# Altium PCB touchid-v4-kicad9format.PcbDoc
Units mm, origin at the board's own origin, x right, y up, seen from the top; angles counter-clockwise.
Board outline 19.3 x 19.3 mm, 4 copper layers (F.Cu, In1.Cu, In2.Cu, B.Cu); 46 components, 27 nets, 134 pads, 65 vias.
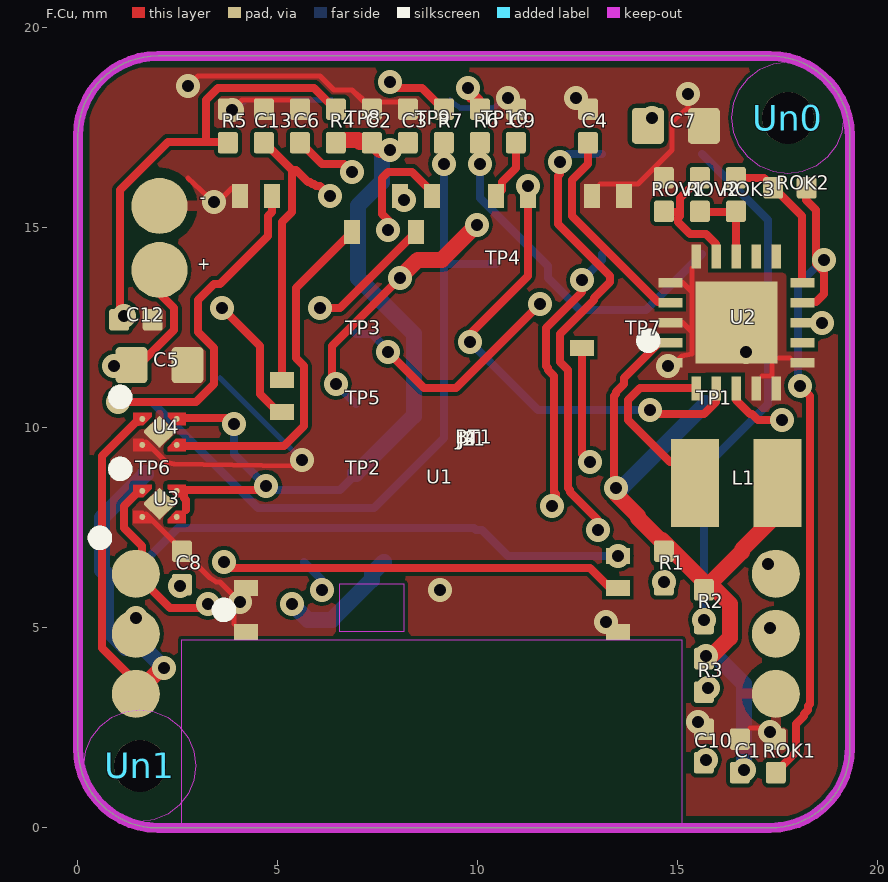
[diagram p0: F.Cu view]
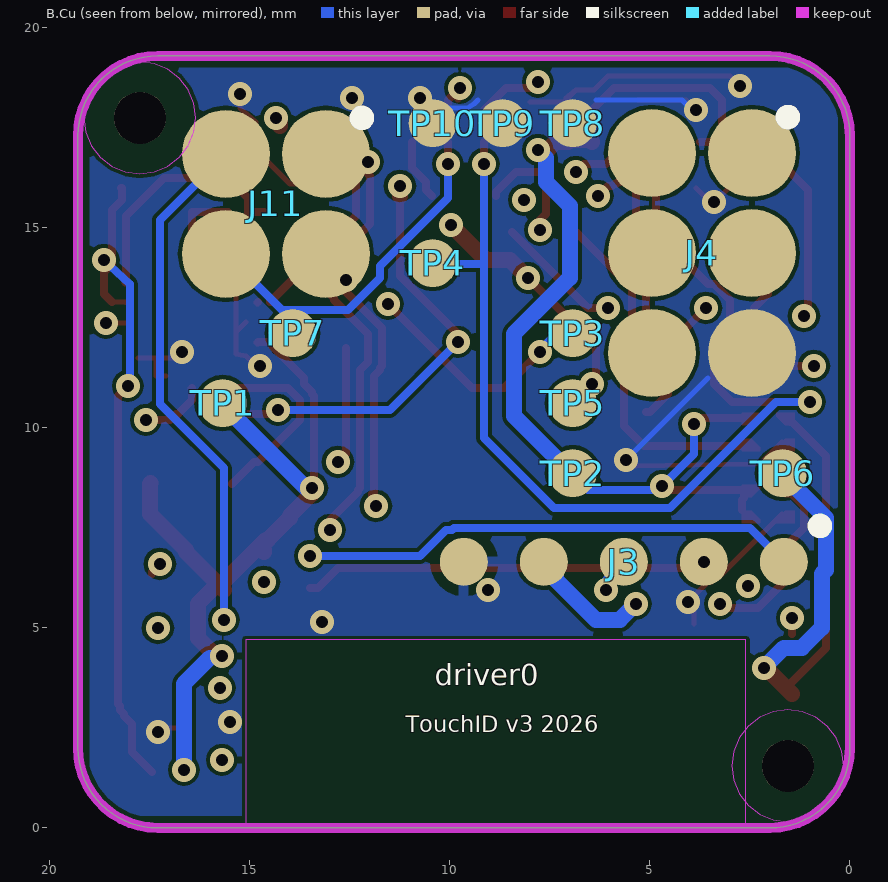
[diagram p1: B.Cu view, seen from below]
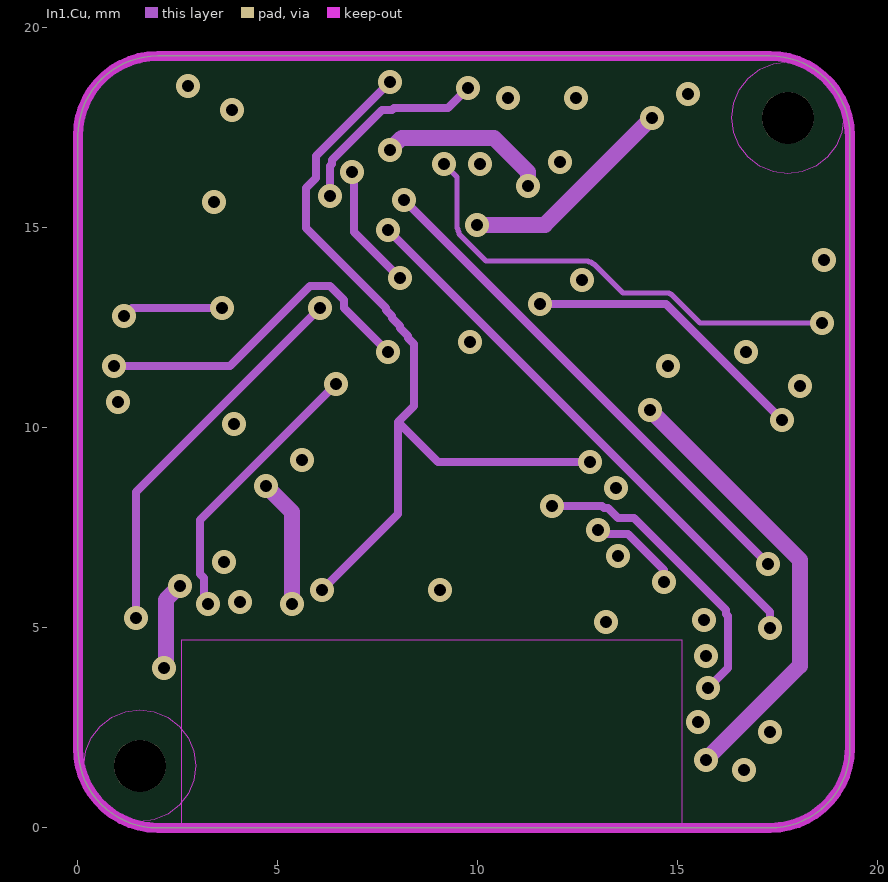
[diagram p2: In1.Cu]
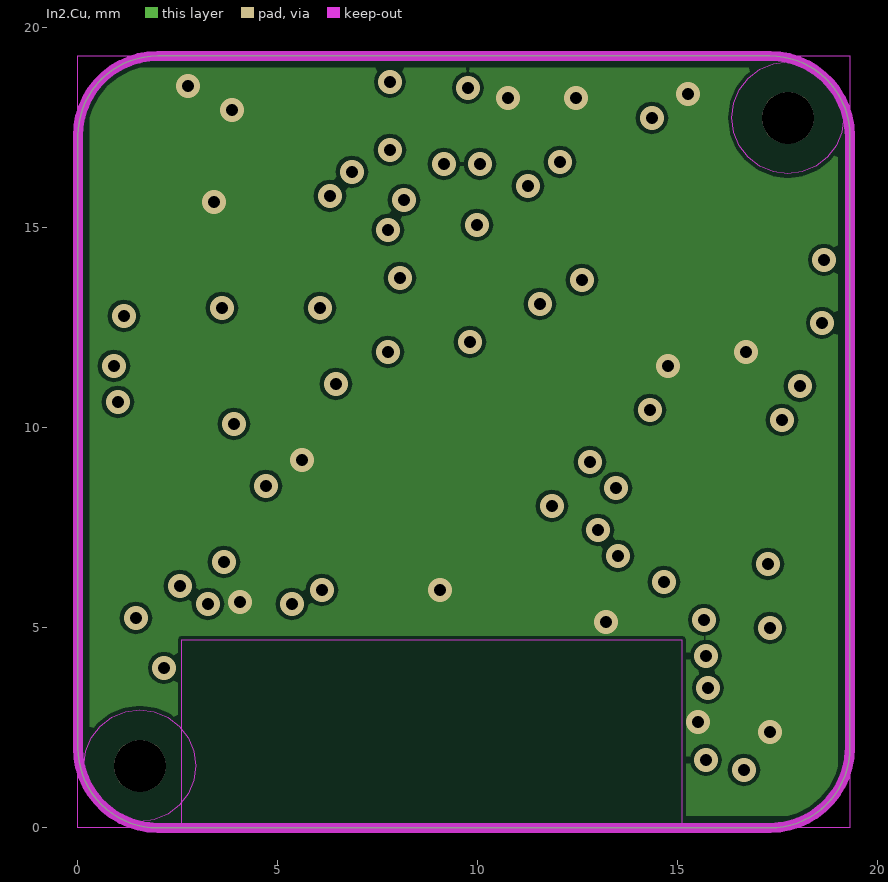
[diagram p3: In2.Cu]

## Layer stack, top to bottom
F.Mask: solder mask 0.0102, Solder Resist, Dk 3.5
F.Cu: signal copper 0.0356
Dielectric 1: dielectric 0.32, FR-4, Dk 4.8
In1.Cu: signal copper 0.0356
Dielectric2: dielectric 0.32, FR-4, Dk 4.8
In2.Cu: signal copper 0.0356
Dielectric3: dielectric 0.32, FR-4, Dk 4.8
B.Cu: signal copper 0.0356
B.Mask: solder mask 0.0102, Solder Resist, Dk 3.5

## Board outline
17.3,19.3 cw(c17.3,17.3) 19.3,17.3 19.3,2 cw(c17.3,2) 17.3,0 2,0 cw(c2,2) 0,2 0,17.3 cw(c2,17.3) 2,19.3 17.3,19.3

## Design rules (kind name [scope] priority, off if disabled: settings)
Clearance "Clearence 0.1_Polygon" [InNamedPolygon('F.Cu-GND') OR InNamedPolygon('In2.Cu-GND') OR InNamedPolygon('B.Cu-GND')] p1: gap=0.1 ignorepadtopadclearanceinfootprint=FALSE
Clearance "Clearence 0.1_NetClass" [InNetClass('Default') OR InNetClass('Power')] p2: gap=0.1 ignorepadtopadclearanceinfootprint=FALSE
MinimumSolderMaskSliver [All] p1: minsoldermaskwidth=0
PolygonConnect Polygon_B.Cu-GND_ConnectDirect [IsNamedPolygon('B.Cu-GND')] p1: connectstyle=Direct reliefconductorwidth=0.254 reliefentries=4 polygonreliefangle="90 Angle" airgapwidth=0.254
PolygonConnect Polygon_In2.Cu-GND_ConnectDirect [IsNamedPolygon('In2.Cu-GND')] p2: connectstyle=Direct reliefconductorwidth=0.254 reliefentries=4 polygonreliefangle="90 Angle" airgapwidth=0.254
PolygonConnect Polygon_F.Cu-GND_ConnectDirect [IsNamedPolygon('F.Cu-GND')] p3: connectstyle=Direct reliefconductorwidth=0.254 reliefentries=4 polygonreliefangle="90 Angle" airgapwidth=0.254
RoutingVias [All] p1: holewidth=0.711 width=1.27 viastyle="Through Hole" minholewidth=0.711 minwidth=1.27 maxholewidth=0.711 maxwidth=1.27
SilkToSilkClearance [All] p1: silktosilkclearance=0
SilkToSolderMaskClearance [IsPad] p1: minsilkscreentomaskgap=0 clearancetoexposedcopper=TRUE
SolderMaskExpansion [All] p1: expansion=0 istentingtop=FALSE
Width [All] p1: maxlimit=10 minlimit=0.127 preferedwidth=0.2 minimp=50.000000 maximp=50.000000 favimp=50.000000
27 further rules are at their usual default settings.

## Classes and differential pairs
net class Power: GND LX SENSOR_3V3 SENSOR_MCU_3V3 VBAT VIN_DC VSTOR
net class Default: BL_FLAG BL_RETURN HARV_1 HARV_2 HARV_3 NRF_VDD OK_HYST OK_PROG RESET SENSOR_RX SENSOR_SW_EN SENSOR_TX SENSOR_WAKEUP SWCLK SWDIO VBAT_OK VBAT_OV_SET VBAT_SENSE VRDIV VREF_SAMP

## Components (designator, comment, footprint, x,y, rotation, side; value= is the part's Value field where it differs from the comment)
BT1 "Comment" BT1 9.65,9.65 r0 top
C1 "Comment" C1 16.55,1.8 r90 top
C2 "Comment" C2 7.35,17.55 r90 top
C3 "Comment" C3 8.25,17.55 r90 top
C4 "Comment" C4 12.75,17.55 r90 top
C5 "Comment" C5 2.04,11.57 r0 top
C6 "Comment" C6 5.55,17.55 r90 top
C7 "Comment" C7 14.95,17.55 r0 top
C8 "Comment" C8 2.6,6.5 r90 top
C9 "Comment" C9 10.95,17.55 r90 top
C10 "Comment" C10 15.65,2.05 r90 top
C12 "Comment" C12 1.45,12.7 r0 top
C13 "Comment" C13 4.65,17.55 r90 top
J2 "Comment" J2 9.65,9.65 r0 top
J3 "Comment" J3 9.65,9.65 r0 top
J4 "Comment" J4 9.65,9.65 r0 top
J11 "Comment" J11 9.65,9.65 r0 top
L1 "Comment" L1 16.46,8.62 r180 top
R1 "Comment" R1 14.65,6.5 r90 top
R2 "Comment" R2 15.65,5.531 r90 top
R3 "Comment" R3 15.65,3.814 r90 top
R4 "Comment" R4 6.45,17.55 r90 top
R5 "Comment" R5 3.75,17.55 r90 top
R6 "Comment" R6 10.05,17.55 r90 top
R7 "Comment" R7 9.15,17.55 r90 top
ROK1 "Comment" ROK1 17.45,1.8 r90 top
ROK2 "Comment" ROK2 17.8,16 r0 top
ROK3 "Comment" ROK3 16.45,15.833 r90 top
ROV1 "Comment" ROV1 14.65,15.833 r90 top
ROV2 "Comment" ROV2 15.55,15.833 r90 top
TP1 "Comment" TP1 15.68,10.62 r0 top
TP2 "Comment" TP2 6.93,8.87 r0 top
TP3 "Comment" TP3 6.93,12.37 r0 top
TP4 "Comment" TP4 10.43,14.12 r0 top
TP5 "Comment" TP5 6.93,10.62 r0 top
TP6 "Comment" TP6 1.68,8.87 r0 top
TP7 "Comment" TP7 13.93,12.37 r0 top
TP8 "Comment" TP8 6.93,17.62 r0 top
TP9 "Comment" TP9 8.68,17.62 r0 top
TP10 "Comment" TP10 10.43,17.62 r0 top
U1 "Comment" U1 8.85,8.65 r0 top
U2 "Comment" U2 16.46,12.63 r0 top
U3 "Comment" U3 2.04,8.1 r0 top
U4 "Comment" U4 2.04,9.9 r0 top
Un0 "Comment" MH 17.75,17.75 r0 top
Un1 "Comment" MH 1.55,1.55 r0 top

## Footprints (in the part's own frame and the unit in brackets; to place one, negate y for a bottom-side part, rotate by r counter-clockwise, add the part's x,y. Pads: shape width x height; smd on the part's side, far side on the other; paste and mask are expansions set on the pad)
BT1 [mm]
  round 1.4 smd paste-1.4 mask-0.1: 1(-7.61,4.3) 2(-7.61,5.9)
C1 [mm]
  rrect25% 0.54x0.5 smd mask+0: 1(-0.42,0) 2(0.42,0)
C2 [mm]
  rrect25% 0.54x0.5 smd mask+0: 1(-0.42,0) 2(0.42,0)
C3 [mm]
  rrect25% 0.54x0.5 smd mask+0: 1(-0.42,0) 2(0.42,0)
C4 [mm]
  rrect25% 0.54x0.5 smd mask+0: 1(-0.42,0) 2(0.42,0)
C5 [mm]
  rrect25% 0.8x0.9 smd mask+0: 1(-0.7,0) 2(0.7,0)
C6 [mm]
  rrect25% 0.54x0.5 smd mask+0: 1(-0.42,0) 2(0.42,0)
C7 [mm]
  rrect25% 0.8x0.9 smd mask+0: 1(-0.7,0) 2(0.7,0)
C8 [mm]
  rrect25% 0.54x0.5 smd mask+0: 1(-0.42,0) 2(0.42,0)
C9 [mm]
  rrect25% 0.54x0.5 smd mask+0: 1(-0.42,0) 2(0.42,0)
C10 [mm]
  rrect25% 0.54x0.5 smd mask+0: 1(-0.42,0) 2(0.42,0)
C12 [mm]
  rrect25% 0.5x0.54 smd mask+0: 1(-0.42,0) 2(0.42,0)
C13 [mm]
  rrect25% 0.54x0.5 smd mask+0: 1(-0.42,0) 2(0.42,0)
J2 [mm]
  round 1.2 smd paste-1.2 mask+0: 1(-8.2,-3.3) 2(-8.2,-4.8) 3(-8.2,-6.3) 4(7.8,-3.3) 5(7.8,-4.8) 6(7.8,-6.3)
J3 [mm]
  round 1.2 smd far side paste-1.2 mask+0: 1(-8,-3) 2(-6,-3) 3(-4,-3) 4(-2,-3) 5(0,-3)
J4 [mm]
  round 2.2 smd far side paste-2.2 mask+0: 1(-7.2,7.22) 2(-4.7,7.22) 3(-7.2,4.72) 4(-4.7,4.72) 5(-7.2,2.22) 6(-4.7,2.22)
J11 [mm]
  round 2.2 smd far side paste-2.2 mask+0: 1(3.45,7.2) 2(5.95,7.2) 3(3.45,4.7) 4(5.95,4.7)
L1 [mm]
  rect 1.2x2.2 smd mask+0: 1(1.028,0) 2(-1.028,0)
MH [mm]
  round 1.3 hole 1.3 paste-2539.97 mask+0: Un1(0,0)
R1 [mm]
  rrect25% 0.54x0.5 smd mask+0: 1(-0.42,0) 2(0.42,0)
R2 [mm]
  rrect25% 0.54x0.5 smd mask+0: 1(-0.42,0) 2(0.42,0)
R3 [mm]
  rrect25% 0.54x0.5 smd mask+0: 1(-0.42,0) 2(0.42,0)
R4 [mm]
  rrect25% 0.54x0.5 smd mask+0: 1(-0.42,0) 2(0.42,0)
R5 [mm]
  rrect25% 0.54x0.5 smd mask+0: 1(-0.42,0) 2(0.42,0)
R6 [mm]
  rrect25% 0.54x0.5 smd mask+0: 1(-0.42,0) 2(0.42,0)
R7 [mm]
  rrect25% 0.54x0.5 smd mask+0: 1(-0.42,0) 2(0.42,0)
ROK1 [mm]
  rrect25% 0.54x0.5 smd mask+0: 1(-0.42,0) 2(0.42,0)
ROK2 [mm]
  rrect25% 0.5x0.54 smd mask+0: 1(-0.42,0) 2(0.42,0)
ROK3 [mm]
  rrect25% 0.54x0.5 smd mask+0: 1(-0.42,0) 2(0.42,0)
ROV1 [mm]
  rrect25% 0.54x0.5 smd mask+0: 1(-0.42,0) 2(0.42,0)
ROV2 [mm]
  rrect25% 0.54x0.5 smd mask+0: 1(-0.42,0) 2(0.42,0)
TP1 [mm]
  round 1.2 smd far side paste-1.2 mask+0: 1(0,0)
TP2 [mm]
  round 1.2 smd far side paste-1.2 mask+0: 1(0,0)
TP3 [mm]
  round 1.2 smd far side paste-1.2 mask+0: 1(0,0)
TP4 [mm]
  round 1.2 smd far side paste-1.2 mask+0: 1(0,0)
TP5 [mm]
  round 1.2 smd far side paste-1.2 mask+0: 1(0,0)
TP6 [mm]
  round 1.2 smd far side paste-1.2 mask+0: 1(0,0)
TP7 [mm]
  round 1.2 smd far side paste-1.2 mask+0: 1(0,0)
TP8 [mm]
  round 1.2 smd far side paste-1.2 mask+0: 1(0,0)
TP9 [mm]
  round 1.2 smd far side paste-1.2 mask+0: 1(0,0)
TP10 [mm]
  round 1.2 smd far side paste-1.2 mask+0: 1(0,0)
U1 [mm]
  rect 0.6x0.4 smd mask+0: 1(-4.65,-3.75) 2(-4.65,-2.65) 9(-3.75,1.75) 11(-3.75,2.55) 40(3.75,3.35) 51(4.65,-1.85) 53(4.65,-2.65) 55(4.65,-3.75)
  rect 0.4x0.6 smd mask+0: 15(-4.8,7.15) 16(-4,7.15) 19(-2,6.25) 22(-0.8,7.15) 23(-0.4,6.25) 24(0,7.15) 28(1.6,7.15) 30(2.4,7.15) 32(4,7.15) 33(4.8,7.15)
U2 [mm]
  rect 0.6x0.24 smd mask+0: 1(-1.65,-1) 2(-1.65,-0.5) 3(-1.65,0) 4(-1.65,0.5) 5(-1.65,1) 11(1.65,1) 12(1.65,0.5) 13(1.65,0) 14(1.65,-0.5) 15(1.65,-1)
  rect 0.24x0.6 smd mask+0: 6(-1,1.65) 7(-0.5,1.65) 8(0,1.65) 9(0.5,1.65) 10(1,1.65) 16(1,-1.65) 17(0.5,-1.65) 18(0,-1.65) 19(-0.5,-1.65) 20(-1,-1.65)
  rect 2.05x2.05 smd mask+0: 21(0,0)
U3 [mm]
  round 0.148 smd paste-0.05 mask-0.05: 1(-0.43,0.325) 2(-0.43,-0.325) 3(0.43,-0.325) 4(0.43,0.325)
  rrect12% 0.58x0.58 smd rot 45 paste-0.065 mask-0.05: 5(0,0)
  F.Cu region: 0.66,0.17 0.409,0.17 0.2,0.379 0.2,0.48 0.66,0.48
  F.Cu region: 0.66,-0.48 0.2,-0.48 0.2,-0.379 0.409,-0.17 0.66,-0.17
  F.Cu region: -0.2,-0.379 -0.2,-0.48 -0.66,-0.48 -0.66,-0.17 -0.409,-0.17
  F.Cu region: -0.2,0.379 -0.409,0.17 -0.66,0.17 -0.66,0.48 -0.2,0.48
U4 [mm]
  round 0.148 smd paste-0.05 mask-0.05: 1(-0.43,0.325) 2(-0.43,-0.325) 3(0.43,-0.325) 4(0.43,0.325)
  rrect12% 0.58x0.58 smd rot 45 paste-0.065 mask-0.05: 5(0,0)
  F.Cu region: 0.66,0.17 0.409,0.17 0.2,0.379 0.2,0.48 0.66,0.48
  F.Cu region: 0.66,-0.48 0.2,-0.48 0.2,-0.379 0.409,-0.17 0.66,-0.17
  F.Cu region: -0.2,-0.379 -0.2,-0.48 -0.66,-0.48 -0.66,-0.17 -0.409,-0.17
  F.Cu region: -0.2,0.379 -0.409,0.17 -0.66,0.17 -0.66,0.48 -0.2,0.48

## Part data
BT1: library part BT1
C1: library part C1
C2: library part C2
C3: library part C3
C4: library part C4
C5: library part C5
C6: library part C6
C7: library part C7
C8: library part C8
C9: library part C9
C10: library part C10
C12: library part C12
C13: library part C13
J2: library part J2
J3: library part J3
J4: library part J4
J11: library part J11
L1: library part L1
R1: library part R1
R2: library part R2
R3: library part R3
R4: library part R4
R5: library part R5
R6: library part R6
R7: library part R7
ROK1: library part ROK1
ROK2: library part ROK2
ROK3: library part ROK3
ROV1: library part ROV1
ROV2: library part ROV2
TP1: library part TP1
TP2: library part TP2
TP3: library part TP3
TP4: library part TP4
TP5: library part TP5
TP6: library part TP6
TP7: library part TP7
TP8: library part TP8
TP9: library part TP9
TP10: library part TP10
U1: library part U1
U2: library part U2
U3: library part U3
U4: library part U4
Un0 Un1: library part MH

## Via types
v1: diameter 0.6, hole 0.3, F.Cu to B.Cu, tented both sides, 65 vias

## Nets (pads, with @x,y where several pads share a name; then routed paths per layer and width w, separated by ;. In a path a pad name is that pad's centre, name@x,y a point inside that pad or via, vN(x,y) a via of type N, cw(c..) or ccw(c..) an arc to the next point about the centre after c; other vN are vias at no path point)
BL_FLAG: C13.1 R6.2 U1.11 | length 13.6
  F.Cu w0.2: C13.1@4.65,17.15 5.35,16.45 ; U1.11 5.1,15.15 5.35,15.4 5.35,16.45 ; v1(6.3,15.8) 6.05,16.05 5.95,16.05 5.9,16.1 5.85,16.1 5.8,16.15 5.75,16.15 5.45,16.45 5.35,16.45 ; v1@9.8,18.24 v1(9.75,18.5) 10.05,18.2 R6.2@10.05,17.95
  In1.Cu w0.2: v1(6.3,15.8) 6.3,16.55 6.35,16.6 6.35,16.7 7.6,17.95 7.85,17.95 7.9,18 9.25,18 v1(9.75,18.5)
BL_RETURN: J11.4 R6.1 TP7.1 | length 9.1
  F.Cu w0.2: R6.1@10.05,16.86 v1(10.05,16.6) R6.1@10.05,17.15
  B.Cu w0.2: v1(10.05,16.6) 10.05,15.75 11.75,14.05 11.75,13.75 12.55,12.95 14.2,12.95 J11.4
GND: BT1.2 C1.2 C2.2 C3.2 C4.2 C5.2 C6.2 C7.2 C8.2 C9.2 C10.2 C12.2 C13.2 J2.6 J3.5 J4.5 R5.2 ROK1.2 ROV1.2 TP8.1 TP9.1 TP10.1 U1.1 U1.2 U1.15 U1.32 U1.33 U1.55 U2.1 U2.3 U2.5 U2.6 U2.15 U2.16 U2.17 U2.21 U3.2 U3.5 U4.2 U4.5 | length 37
  F.Cu w0.127: 2.75,16.25 v1(3.4,15.65) ; v1(2.75,18.55) 3,18.8 6.05,18.8 6.4,18.45 6.85,18.45 ; 2.85,6.7 3.3,6.25 ; v1@3.6,15.75 U1.15@3.85,16 ; v1(3.85,17.95) 4.1,18.2 4.4,18.2 5.3,18.2 ; 3.9,5.1 v1@3.9,5.4 ; v1(4.05,5.65) 3.55,6.15 3.45,6.15 ; v1@5.35,9.05 2.4,9.1 2.2,9.15 ; 7.1,18.25 6.85,18.45 ; 8,18.15 7.15,18.15 6.85,18.45 ; 13.05,16.1 14,16.1 14.85,16.95 ; 14.4,16.5 14.85,16.95 ; U2.1@14.95,11.65 15.1,11.8 15.35,11.85 15.35,12.4 ; U2.3@15.1,12.65 15.35,12.4 ; U2.5@15.1,13.65 15.35,13.4 ; v1(15.25,18.35) 15.25,18 14.85,17.65 14.85,16.95 ; U2.6@15.35,14 15.35,13.4 ; v1(16.7,11.9) 16.85,11.75 17.8,11.75 ; 16.8,2.5 17.2,2.5 v1(17.3,2.4) ; 17.1,11.3 17.35,11.3 U2.21@17.35,11.75 ; 2.2,9.15 1.7,9.65 2.2,9.15 ; 3.3,6.25 3.45,6.15 ; 3.3,6.25 1.7,7.85 3.3,6.25 ; 3.3,6.25 3.45,6.15 ; 3.3,6.25 3.45,6.15 ; 15.35,12.4 15.35,13.4
  B.Cu w0.127: 3.55,11.25 v1(5.6,9.2) ; v1@4.05,18.05 4.2,18.2 6.35,18.2 ; v1(9.05,5.95) v1@9.05,6.05 ; 9.3,18.2 9.4,18.1 9.55,18 10.4,18 TP10.1@10.55,18.15
  other v1: 15.5,2.65 13.2,5.15 14.75,11.55 10.75,18.25 12.45,18.25
HARV_1: J11.1 R1.1 | length 14.2
  F.Cu w0.2: v1(12.05,16.65) 12.05,16.35 12,16.3 12,15.1 13.3,13.8 13.3,13.65 12.9,13.25 12.9,13.2 12.05,12.35 12.05,11.65 12.25,11.45 12.25,8.5 12.3,8.45 12.3,8.4 13,7.7 v1(13,7.45)
  In1.Cu w0.2: v1(13,7.45) 13.1,7.35 13.75,7.35 14.65,6.45 v1(14.65,6.15)
  B.Cu w0.2: v1(12.05,16.65) 12.25,16.85 J11.1
HARV_2: J11.2 R2.1 | length 13
  B.Cu w0.2: J11.2 17.25,15.2 17.25,10.6 15.65,9 v1(15.65,5.2)
HARV_3: J11.3 R3.1 | length 14.4
  F.Cu w0.2: v1@11.95,8.15 11.95,8.35 11.9,8.4 11.9,11.3 11.75,11.45 11.75,11.5 11.7,11.55 11.7,12.5 12.6,13.4 12.6,13.45 12.7,13.55 v1@12.7,13.6
  In1.Cu w0.2: v1(11.85,8.05) 13.1,8.05 13.15,8 13.25,8 13.5,7.75 13.9,7.75 16.2,5.45 16.2,5.35 16.25,5.3 16.25,4 v1(15.75,3.5)
  B.Cu w0.2: v1(12.6,13.7) 13.1,14.2 J11.3
LX: L1.1 U2.20 | length 4.7
  F.Cu w0.2: L1.1 15.45,8.6 14.9,9.15 14.8,9.15 13.75,10.2 13.75,10.7 14.05,11 15.45,11 U2.20
NRF_VDD: C9.1 U1.28 | length 1.6
  F.Cu w0.2: U1.28 10.6,15.95 10.6,16.15 10.95,16.5 C9.1@10.95,17.15
OK_HYST: ROK2.1 ROK3.2 U2.11 | length 3.7
  F.Cu w0.2: ROK3.2@16.45,16.25 17.15,16.25 17.4,16 18.1,15.3 18.1,13.65 U2.11
OK_PROG: ROK1.1 ROK2.2 U2.12 | length 17.1
  F.Cu w0.127: U2.12 18.1,13.15 18.45,13.15
  F.Cu w0.2: ROK1.1@17.45,1.4 17.95,1.9 17.95,2.6 18.15,2.8 18.15,2.85 18.25,2.95 18.25,3.05 18.3,3.1 18.3,10.8 v1(18.05,11.05) ; ROK2.2 18.2,16 18.2,15.7 18.45,15.45 v1@18.45,14.1 ; 18.45,13.15 18.65,13.35 18.65,13.9 v1@18.45,14.1 ; v1@18.5,14.1 v1@18.45,14.1
  B.Cu w0.2: v1@18,11.1 18,13.6 v1(18.65,14.2)
RESET: J3.3 R7.2 U1.40 | length 26.3
  F.Cu w0.2: v1(7.8,18.65) 7.95,18.5 8.6,18.5 R7.2@9.15,17.95 ; U1.40 12.6,9.35 v1(12.8,9.15)
  In1.Cu w0.2: v1(6.1,5.95) 8,7.85 8,10.15 ; v1(7.8,18.65) 5.95,16.8 5.95,16.25 5.7,16 5.7,15 7.7,13 7.7,12.95 7.85,12.8 7.85,12.75 8.05,12.55 8.05,12.5 8.25,12.3 8.25,12.25 8.4,12.1 8.4,10.55 8,10.15 ; v1(12.8,9.15) 9,9.15 8,10.15
  B.Cu w0.2: J3.3 6.1,6.2 v1(6.1,5.95)
SENSOR_3V3: C6.1 C7.1 J2.1 TP5.1 U3.1 | length 28.4
  F.Cu w0.2: U3.1 1.6,8.45 1.55,8.45 1.15,8.05 1.15,7.5 1.6,7.05 1.6,6.2 2.3,5.5 3.15,5.5 v1(3.25,5.6) ; C6.1@5.55,17.15 6.1,16.6 6.65,16.6 v1(6.85,16.4) ; v1@6.35,11.2 6.35,12.05 v1(8.05,13.75)
  F.Cu w0.4: J2.1 J2.1@1.6,6.35 ; v1(8.05,13.75) 8.5,14.2 9.1,14.2 v1(9.975,15.075) ; C7.1 C7.1@14.25,17.65
  In1.Cu w0.2: v1@3.15,5.7 3.15,6.25 3.05,6.35 3.05,7.7 v1(6.45,11.1) ; v1@6.9,16.35 6.9,14.9 v1(8.05,13.75)
  In1.Cu w0.4: v1(9.975,15.075) 11.675,15.075 v1(14.35,17.75)
  B.Cu w0.2: v1(6.45,11.1) 6.95,10.6 TP5.1
SENSOR_MCU_3V3: C8.1 J2.3 TP6.1 U4.1 | length 16.9
  F.Cu w0.2: J2.3@1.6,3.5 0.6,4.5 0.6,6.45 0.6,9.3 1.45,10.15 1.5,10.15 1.6,10.25 U4.1
  F.Cu w0.4: J2.3 v1@2.1,4
  In1.Cu w0.4: v1@2.2,4.05 2.2,5.7 v1(2.55,6.05)
  B.Cu w0.4: TP6.1 1.7,8.85 0.6,7.75 0.6,6.45 0.7,6.35 0.7,5 1.2,4.5 1.65,4.5 v1(2.15,4)
SENSOR_RX: J2.5 U1.24 | length 17
  F.Cu w0.2: v1@7.85,15.05 7.85,15.1 7.6,15.35 7.6,16.25 7.75,16.4 8.35,16.4 8.85,15.9 U1.24 ; v1(17.3,5) J2.5
  In1.Cu w0.2: v1(7.75,14.95) 17.3,5.4 v1(17.3,5)
SENSOR_SW_EN: U1.19 U4.3 | length 9
  F.Cu w0.2: U4.3 2.45,9.55 5.15,9.55 5.65,10.05 5.65,11.55 5.45,11.75 5.45,13.5 U1.19
SENSOR_TX: J2.4 U1.22 | length 13.2
  F.Cu w0.2: v1(17.25,6.6) 17.45,6.4 J2.4
  In1.Cu w0.2: v1(8.15,15.7) v1(17.25,6.6)
SENSOR_WAKEUP: J2.2 U1.23 | length 13.2
  F.Cu w0.2: J2.2 v1(1.45,5.25) ; v1(6.05,13) 6.55,13 U1.23
  In1.Cu w0.2: v1(1.45,5.25) 1.45,8.4 v1(6.05,13)
SWCLK: J3.2 U1.53 | length 10.1
  F.Cu w0.2: v1(3.65,6.65) 3.8,6.5 12.8,6.5 13.3,6 U1.53
SWDIO: J3.1 U1.51 | length 12.5
  B.Cu w0.2: J3.1 2.5,7.5 9.9,7.5 9.95,7.45 10.1,7.45 10.75,6.8 v1(13.5,6.8)
VBAT: BT1.1 C5.1 TP3.1 U2.18 | length 27
  F.Cu w0.2: v1(0.9,11.55) 1.35,11.55 1.5,11.55 2.4,12.45 2.4,13 2.05,13.35 BT1.1@2.05,13.95 ; v1(7.75,11.9) 8.65,11 9.45,11 v1(11.55,13.1) ; U2.18 16.45,11 16.45,10.7 16.8,10.35 16.85,10.35 17,10.2 v1(17.6,10.2)
  In1.Cu w0.2: v1(0.9,11.55) 3.8,11.55 5.8,13.55 6.3,13.55 6.65,13.2 6.65,13 v1(7.75,11.9) ; v1(11.55,13.1) 14.7,13.1 v1(17.6,10.2)
  B.Cu w0.2: TP3.1 6.95,12.35 7.35,12.35 7.6,12.1 7.6,12.05 v1(7.75,11.9)
VBAT_OK: R7.1 TP4.1 U1.16 U2.13 | length 39.9
  F.Cu w0.127: U2.13@18.1,12.625 v1(18.6,12.625) v1@18.41,12.625
  F.Cu w0.2: v1(1,10.65) 2.95,10.65 3.4,11.1 3.4,12 3,12.4 3,13.2 3.4,13.6 3.55,13.6 4.75,14.8 4.75,15.3 4.85,15.4 U1.16 ; R7.1@9.15,16.86 v1(9.15,16.6) 9.15,17.15 R7.1
  In1.Cu w0.127: v1(9.15,16.6) 9.475,16.275 9.475,15 9.5,14.975 9.5,14.925 9.525,14.9 9.525,14.85 10.2,14.175 12.75,14.175 12.775,14.15 12.825,14.15 12.875,14.1 12.9,14.1 13.625,13.375 14.775,13.375 14.8,13.35 14.825,13.35 15.55,12.625 v1(18.6,12.625)
  B.Cu w0.2: v1(1,10.65) 1.85,10.65 4.5,8 7.4,8 9.15,9.75 v1(9.15,16.6) ; 9.15,14.1 10.45,14.1 TP4.1
VBAT_OV_SET: ROV1.1 ROV2.2 U2.7 | length 3.2
  F.Cu w0.2: ROV1.1@14.65,15.4 15.05,15.4 ; ROV2.2@15.55,16.25 15.05,15.75 15.05,15.3 15,15.25 15,15.15 15.3,14.85 15.7,14.85 15.95,14.6 15.95,14.3 U2.7
VBAT_SENSE: C12.1 R4.2 R5.1 U1.9 | length 16.9
  F.Cu w0.2: C12.1@1.05,12.7 1.05,15.95 2.25,17.15 R5.1@3.75,17.15 ; 3.2,17.15 3.2,18.2 3.5,18.5 5.9,18.5 R4.2@6.45,17.95 ; v1(3.6,13) 4.55,12.05 4.55,10.85 5,10.4 U1.9
  In1.Cu w0.2: v1(1.15,12.8) 1.35,13 v1(3.6,13)
VIN_DC: C1.1 L1.2 R1.2 R2.2 R3.2 TP1.1 U2.2 | length 19.6
  F.Cu w0.2: v1(13.45,8.5) 13.4,8.55 13.4,10.8 13.45,10.85 13.45,10.9 13.65,11.1 13.65,11.25 14.55,12.15 14.8,12.15 U2.2
  F.Cu w0.4: v1@13.45,8.35 14,7.8 14,7.75 14.55,7.2 ; 14.6,7.2 R2.2@15.75,6.05 ; R1.2 14.65,6.9 14.65,6.95 R1.2@14.75,7.05 ; R2.2 16.6,6.9 16.6,6.95 17.5,7.85 17.5,8.6 L1.2 ; R3.2@15.8,4.25 16.3,4.75 16.3,5.6 R2.2@15.8,6.1
  B.Cu w0.4: v1@13.6,8.5 15.7,10.6 TP1.1 ; 16,4.25 16.65,3.6 v1(16.65,1.45)
  other v1: 15.7,4.3
VRDIV: ROK3.1 ROV2.1 U2.8 | length 2
  F.Cu w0.2: ROV2.1@15.55,15.4 16.45,15.4 16.45,14.3 U2.8
VREF_SAMP: C4.1 U2.4 | length 5.1
  F.Cu w0.2: C4.1@12.75,17.15 12.75,16.6 12.35,16.2 12.35,15.3 14.5,13.15 ; U2.4@14.8,13.15 U2.4
VSTOR: C2.1 C3.1 C10.1 J3.4 R4.1 TP2.1 U1.30 U2.19 U3.3 U3.4 U4.4 | length 53.5
  F.Cu w0.2: U3.3 2.45,7.75 U3.3@2.5,7.75 ; U3.4 2.45,8.45 v1@4.6,8.45 ; U4.4 2.45,10.25 3.75,10.25 v1(3.9,10.1) ; 2.65,8.45 2.65,8.25 2.7,8.2 2.7,7.95 ; v1(9.8,12.15) 9.8,12.35 11.25,13.8 U1.30 ; v1@14.4,10.35 15.65,10.35 15.95,10.65 15.95,11 U2.19
  F.Cu w0.4: R4.1@6.45,17.15 6.5,17.2 7,17.2 7.05,17.15 7.35,17.15 7.55,16.95 v1(7.8,16.95) v1@7.6,16.95 ; U1.30 v1(11.25,16.05)
  In1.Cu w0.4: v1(4.7,8.55) 5.35,7.9 v1(5.35,5.6) ; v1(7.8,16.95) 8.1,17.25 10.4,17.25 11.25,16.4 v1(11.25,16.05) ; v1(14.3,10.45) 18.05,6.7 18.05,4.05 v1(15.7,1.7)
  B.Cu w0.2: v1(3.9,10.1) 3.9,9.35 v1(4.7,8.55) ; v1@4.8,8.45 6.55,8.45 TP2.1@6.95,8.85 ; v1(9.8,12.15) 11.5,10.45 v1(14.3,10.45)
  B.Cu w0.4: v1(5.35,5.6) 5.75,5.2 6.35,5.2 7.35,6.2 7.35,6.35 J3.4 ; TP2.1 6.95,8.85 8.4,10.3 8.4,12.35 7,13.75 7,15.55 7.6,16.15 7.6,16.75 v1(7.8,16.95)
pads on no net: J4.1 J4.2 J4.3 J4.4 J4.6 U2.9 U2.10 U2.14 Un0.Un1 Un1.Un1

## Polygon pours and split planes (outlines as drawn)
GND on F.Cu "F.Cu-GND" (solid, remove dead copper, pour order 0): 0.3,19 19,19 19,0.3 0.3,0.3
GND on In2.Cu "In2.Cu-GND" (solid, remove dead copper, pour order 1): 0.3,19 19,19 19,0.3 0.3,0.3
GND on B.Cu "B.Cu-GND" (solid, remove dead copper, pour order 2): 0.3,19 19,19 19,0.3 0.3,0.3

## Keep-outs
F.Cu:
  region: 8.15,4.9 6.55,4.9 6.55,6.1 8.15,6.1
  region: 15.1,0 2.6,0 2.6,4.7 15.1,4.7
  region: 1.912,2.902 2.25,2.762 2.54,2.54 2.762,2.25 2.902,1.912 2.95,1.55 2.902,1.188 2.762,0.85 2.54,0.56 2.25,0.338 1.912,0.198 1.55,0.15 1.188,0.198 0.85,0.338 0.56,0.56 0.338,0.85 0.198,1.188 0.15,1.55 0.198,1.912 0.338,2.25 0.56,2.54 0.85,2.762 1.188,2.902 1.55,2.95
  region: 18.112,19.102 18.45,18.962 18.74,18.74 18.962,18.45 19.102,18.112 19.15,17.75 19.102,17.388 18.962,17.05 18.74,16.76 18.45,16.538 18.112,16.398 17.75,16.35 17.388,16.398 17.05,16.538 16.76,16.76 16.538,17.05 16.398,17.388 16.35,17.75 16.398,18.112 16.538,18.45 16.76,18.74 17.05,18.962 17.388,19.102 17.75,19.15
In1.Cu:
  region: 15.1,0 2.6,0 2.6,4.7 15.1,4.7
  region: 1.912,2.902 2.25,2.762 2.54,2.54 2.762,2.25 2.902,1.912 2.95,1.55 2.902,1.188 2.762,0.85 2.54,0.56 2.25,0.338 1.912,0.198 1.55,0.15 1.188,0.198 0.85,0.338 0.56,0.56 0.338,0.85 0.198,1.188 0.15,1.55 0.198,1.912 0.338,2.25 0.56,2.54 0.85,2.762 1.188,2.902 1.55,2.95
  region: 18.112,19.102 18.45,18.962 18.74,18.74 18.962,18.45 19.102,18.112 19.15,17.75 19.102,17.388 18.962,17.05 18.74,16.76 18.45,16.538 18.112,16.398 17.75,16.35 17.388,16.398 17.05,16.538 16.76,16.76 16.538,17.05 16.398,17.388 16.35,17.75 16.398,18.112 16.538,18.45 16.76,18.74 17.05,18.962 17.388,19.102 17.75,19.15
In2.Cu:
  region: 19.3,0 0,0 0,19.3 19.3,19.3
  region: 15.1,0 2.6,0 2.6,4.7 15.1,4.7
  region: 1.912,2.902 2.25,2.762 2.54,2.54 2.762,2.25 2.902,1.912 2.95,1.55 2.902,1.188 2.762,0.85 2.54,0.56 2.25,0.338 1.912,0.198 1.55,0.15 1.188,0.198 0.85,0.338 0.56,0.56 0.338,0.85 0.198,1.188 0.15,1.55 0.198,1.912 0.338,2.25 0.56,2.54 0.85,2.762 1.188,2.902 1.55,2.95
  region: 18.112,19.102 18.45,18.962 18.74,18.74 18.962,18.45 19.102,18.112 19.15,17.75 19.102,17.388 18.962,17.05 18.74,16.76 18.45,16.538 18.112,16.398 17.75,16.35 17.388,16.398 17.05,16.538 16.76,16.76 16.538,17.05 16.398,17.388 16.35,17.75 16.398,18.112 16.538,18.45 16.76,18.74 17.05,18.962 17.388,19.102 17.75,19.15
B.Cu:
  region: 15.1,0 2.6,0 2.6,4.7 15.1,4.7
  region: 1.912,2.902 2.25,2.762 2.54,2.54 2.762,2.25 2.902,1.912 2.95,1.55 2.902,1.188 2.762,0.85 2.54,0.56 2.25,0.338 1.912,0.198 1.55,0.15 1.188,0.198 0.85,0.338 0.56,0.56 0.338,0.85 0.198,1.188 0.15,1.55 0.198,1.912 0.338,2.25 0.56,2.54 0.85,2.762 1.188,2.902 1.55,2.95
  region: 18.112,19.102 18.45,18.962 18.74,18.74 18.962,18.45 19.102,18.112 19.15,17.75 19.102,17.388 18.962,17.05 18.74,16.76 18.45,16.538 18.112,16.398 17.75,16.35 17.388,16.398 17.05,16.538 16.76,16.76 16.538,17.05 16.398,17.388 16.35,17.75 16.398,18.112 16.538,18.45 16.76,18.74 17.05,18.962 17.388,19.102 17.75,19.15
Edge.Cuts:
  lines w0: 0,2 ccw(c2,2) 2,0 17.3,0 ccw(c17.3,2) 19.3,2 19.3,17.3 ccw(c17.3,17.3) 17.3,19.3 2,19.3 ccw(c2,17.3) 0,17.3 0,2
  lines w0.254: 0,2 ccw(c2,2) 2,0 17.3,0 ccw(c17.3,2) 19.3,2 19.3,17.3 ccw(c17.3,17.3) 17.3,19.3 2,19.3 ccw(c2,17.3) 0,17.3 0,2

## Silkscreen, mask and mechanical layers (free items; w line width, h text height)
F.SilkS:
  circle w0.254: c0.55,7.25 r0.18
  circle w0.254: c1.06,10.775 r0.18
  circle w0.254: c1.06,8.975 r0.18
  circle w0.254: c14.26,12.18 r0.18
  circle w0.254: c3.65,5.45 r0.18
  region: 0.62,7.42 0.68,7.38 0.72,7.32 0.734,7.25 0.72,7.18 0.68,7.12 0.62,7.08 0.55,7.066 0.48,7.08 0.42,7.12 0.38,7.18 0.366,7.25 0.38,7.32 0.42,7.38 0.48,7.42 0.55,7.434
  region: 1.13,10.945 1.19,10.905 1.23,10.845 1.244,10.775 1.23,10.705 1.19,10.645 1.13,10.605 1.06,10.591 0.99,10.605 0.93,10.645 0.89,10.705 0.876,10.775 0.89,10.845 0.93,10.905 0.99,10.945 1.06,10.959
  region: 1.13,9.145 1.19,9.105 1.23,9.045 1.244,8.975 1.23,8.905 1.19,8.845 1.13,8.805 1.06,8.791 0.99,8.805 0.93,8.845 0.89,8.905 0.876,8.975 0.89,9.045 0.93,9.105 0.99,9.145 1.06,9.159
  region: 14.33,12.35 14.39,12.31 14.43,12.25 14.444,12.18 14.43,12.11 14.39,12.05 14.33,12.01 14.26,11.996 14.19,12.01 14.13,12.05 14.09,12.11 14.076,12.18 14.09,12.25 14.13,12.31 14.19,12.35 14.26,12.364
  region: 3.72,5.62 3.78,5.58 3.82,5.52 3.834,5.45 3.82,5.38 3.78,5.32 3.72,5.28 3.65,5.266 3.58,5.28 3.52,5.32 3.48,5.38 3.466,5.45 3.48,5.52 3.52,5.58 3.58,5.62 3.65,5.634
  text "-" at 3.04,15.533 h0.5
  text "+" at 2.98,13.852 h0.5
B.SilkS:
  circle w0.254: c12.2,17.75 r0.18
  circle w0.254: c1.55,17.77 r0.18
  circle w0.254: c0.75,7.55 r0.18
  region: 12.27,17.92 12.33,17.88 12.37,17.82 12.384,17.75 12.37,17.68 12.33,17.62 12.27,17.58 12.2,17.566 12.13,17.58 12.07,17.62 12.03,17.68 12.016,17.75 12.03,17.82 12.07,17.88 12.13,17.92 12.2,17.934
  region: 1.62,17.94 1.68,17.9 1.72,17.84 1.734,17.77 1.72,17.7 1.68,17.64 1.62,17.6 1.55,17.586 1.48,17.6 1.42,17.64 1.38,17.7 1.366,17.77 1.38,17.84 1.42,17.9 1.48,17.94 1.55,17.954
  region: 0.82,7.72 0.88,7.68 0.92,7.62 0.934,7.55 0.92,7.48 0.88,7.42 0.82,7.38 0.75,7.366 0.68,7.38 0.62,7.42 0.58,7.48 0.566,7.55 0.58,7.62 0.62,7.68 0.68,7.72 0.75,7.734
  text "driver0" at 10.375,3.393 h0.9
  text "TouchID v3 2026" at 11.099,2.251 h0.7
F.Fab:
  text "-" at 3.048,15.536 h0.4
  text "+" at 2.999,13.871 h0.4
  text "DIO" at 1.492,7.536 h0.4
  text "CLK" at 3.489,7.536 h0.4
  text "RST" at 5.502,7.536 h0.4
  text "VDD" at 7.466,7.537 h0.4
  text "GND" at 9.454,7.536 h0.4
  text "3V3" at 2.606,6.236 h0.4
  text "TX" at 16.217,6.239 h0.4
  text "RX" at 16.217,4.739 h0.4
  text "WAKE" at 2.683,4.737 h0.4
  text "3V3M" at 2.716,3.236 h0.4
  text "GND" at 15.942,3.236 h0.4